# Altium PCB flyback(1).PcbDoc
Units mm, origin at the board's own origin, x right, y up, seen from the top; angles counter-clockwise.
Board outline 151.66 x 75.82 mm, 2 copper layers (F.Cu, B.Cu); 52 components, 27 nets, 126 pads, 4 vias.
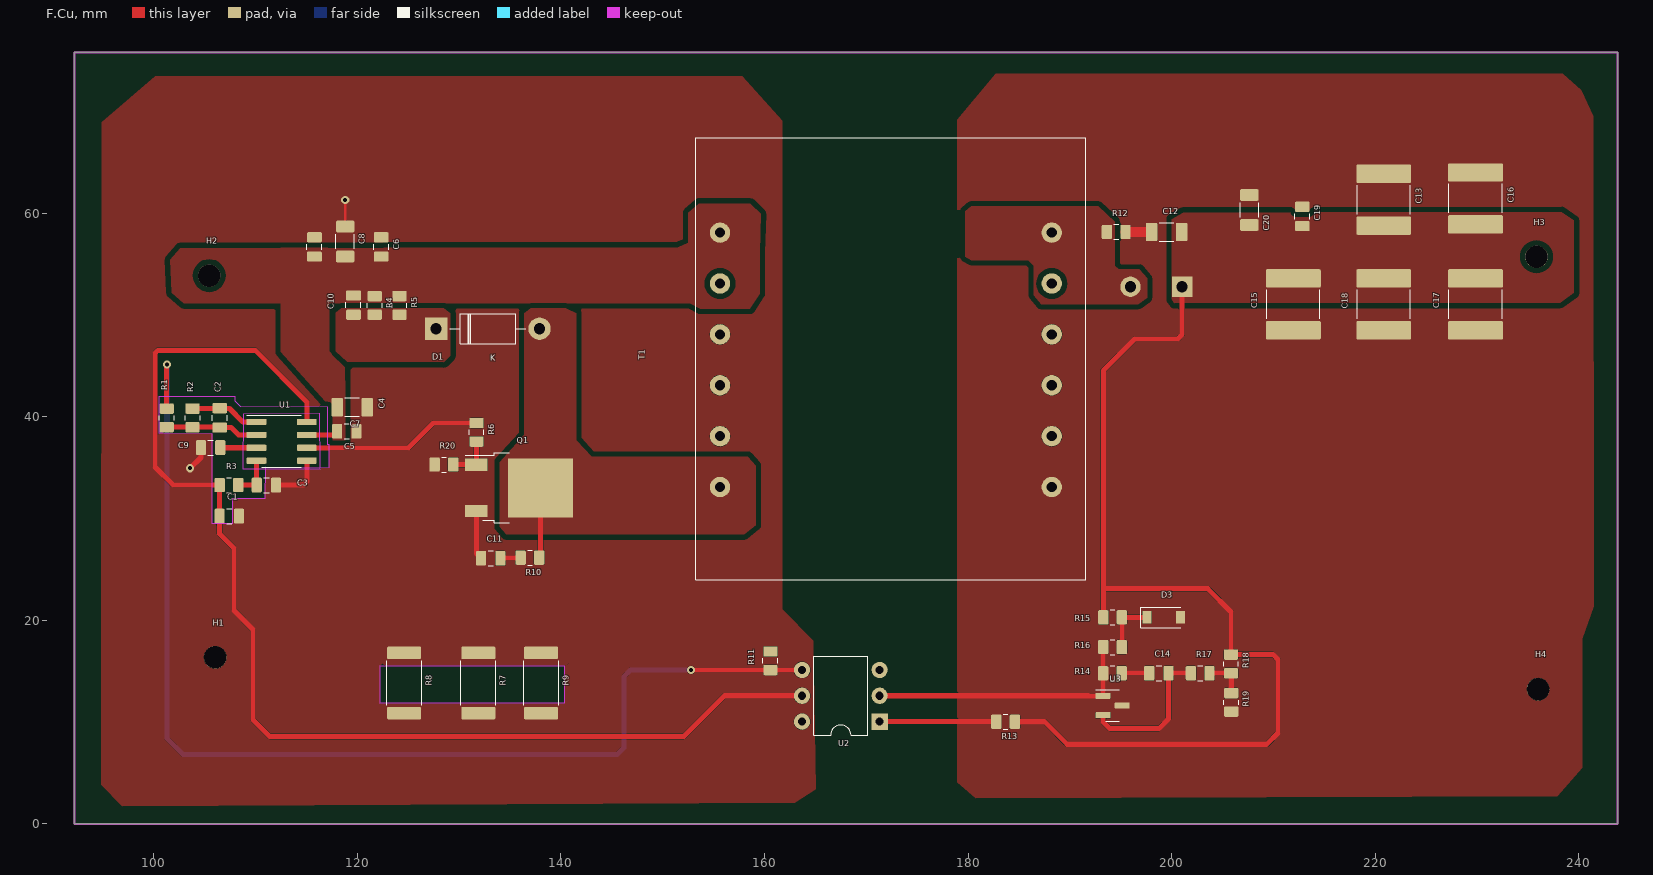
[diagram p0: F.Cu view]
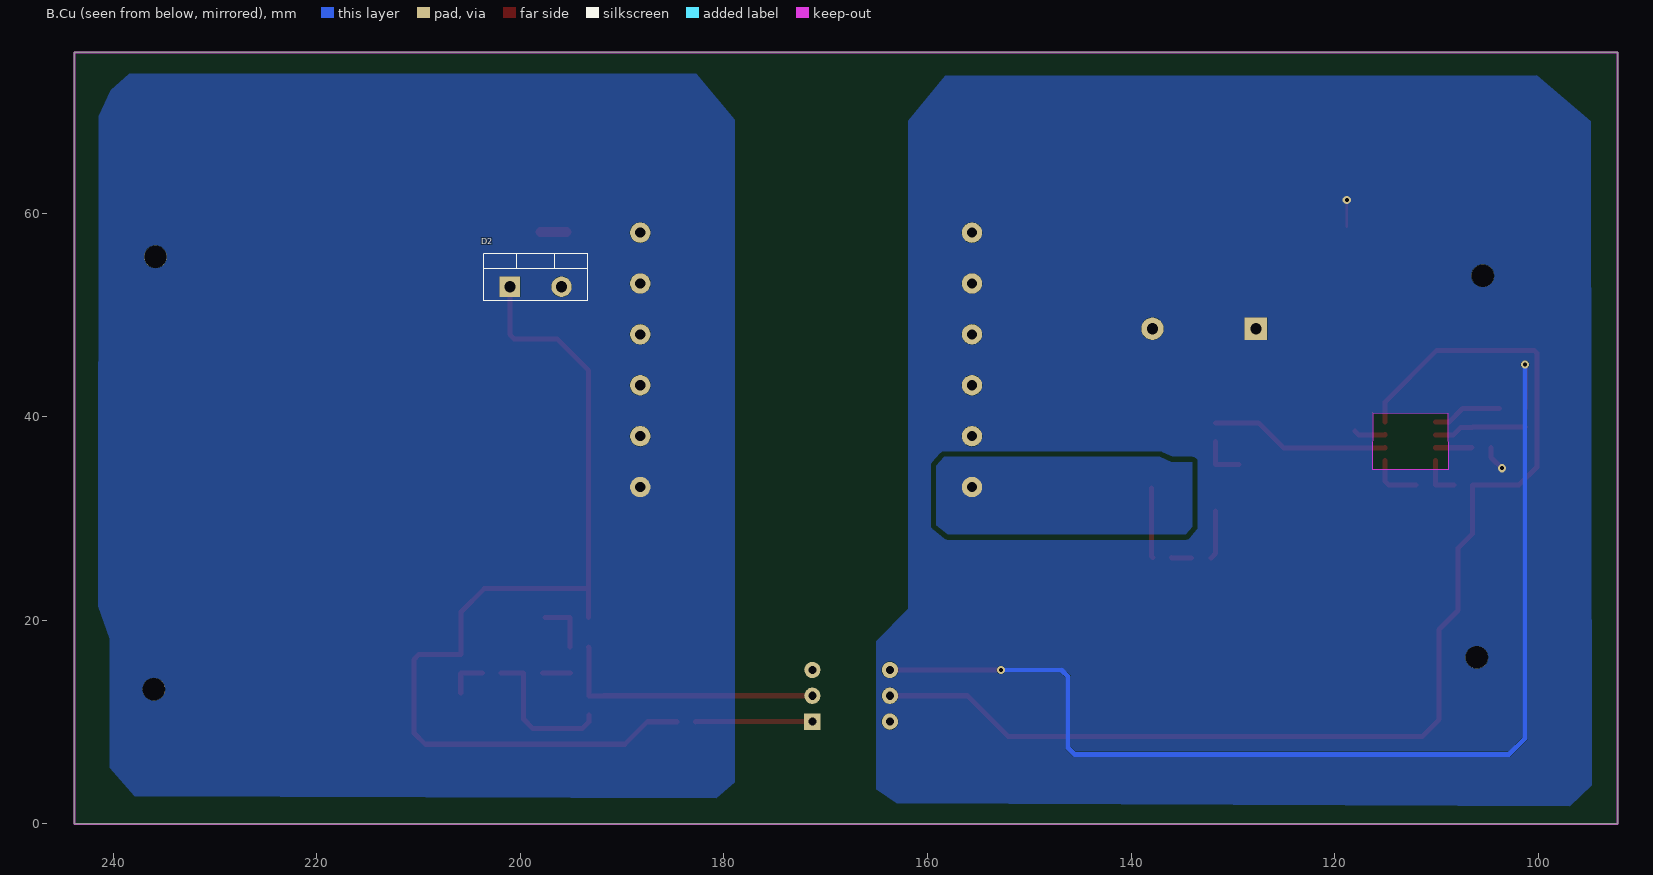
[diagram p1: B.Cu view, seen from below]

## Layer stack, top to bottom
F.Mask: solder mask 0.0102, Solder Resist, Dk 3.5
F.Cu: signal copper 0.0356
Dielectric 1: dielectric 0.32, FR-4, Dk 4.8
B.Cu: signal copper 0.0356
B.Mask: solder mask 0.0102, Solder Resist, Dk 3.5

## Board outline
243.84,0 243.84,75.819 92.177,75.819 92.177,0 243.84,0

## Design rules (kind name [scope] priority, off if disabled: settings)
Clearance "Clearence 0,508_Polygon" [InNamedPolygon('F.Cu-/Vin') OR InNamedPolygon('F.Cu-Net-(D2-Pad2)') OR InNamedPolygon('F.Cu-Net-(C10-Pad2)') OR InNamedPolygon('F.Cu-Net-(D1-Pad2)') OR InNamedPolygon('F.Cu-/Vin-1') OR InNamedPolygon('F.Cu-/Vout') OR InNamedPolygon('B.Cu-Net-(D1-Pad2)')] p1: gap=0.508 ignorepadtopadclearanceinfootprint=FALSE
MinimumSolderMaskSliver [All] p1: minsoldermaskwidth=0
PolygonConnect Polygon_B.Cu-GND1_ConnectDirect [IsNamedPolygon('B.Cu-GND1') vs IsVia] p1: connectstyle=Direct reliefconductorwidth=0.254 reliefentries=4 polygonreliefangle="90 Angle" airgapwidth=0.254
PolygonConnect Polygon_B.Cu-GND1_ConnectRelief45 [IsNamedPolygon('B.Cu-GND1') vs (IsThruPin or IsSMTPin) and (PadShape_AllLayers = 'Round')] p2: connectstyle=Relief reliefconductorwidth=0.508 reliefentries=4 polygonreliefangle="45 Angle" airgapwidth=0.508
PolygonConnect Polygon_B.Cu-GND1_ConnectRelief90 [IsNamedPolygon('B.Cu-GND1') vs (IsThruPin or IsSMTPin) and (PadShape_AllLayers <> 'Round')] p3: connectstyle=Relief reliefconductorwidth=0.508 reliefentries=4 polygonreliefangle="90 Angle" airgapwidth=0.508
PolygonConnect Polygon_B.Cu-Net-(D1-Pad2)_ConnectDirect [IsNamedPolygon('B.Cu-Net-(D1-Pad2)')] p4: connectstyle=Direct reliefconductorwidth=0.254 reliefentries=4 polygonreliefangle="90 Angle" airgapwidth=0.254
PolygonConnect Polygon_F.Cu-/Vout_ConnectDirect [IsNamedPolygon('F.Cu-/Vout')] p5: connectstyle=Direct reliefconductorwidth=0.254 reliefentries=4 polygonreliefangle="90 Angle" airgapwidth=0.254
PolygonConnect Polygon_F.Cu-/Vin-1_ConnectDirect [IsNamedPolygon('F.Cu-/Vin-1')] p6: connectstyle=Direct reliefconductorwidth=0.254 reliefentries=4 polygonreliefangle="90 Angle" airgapwidth=0.254
PolygonConnect Polygon_F.Cu-Net-(D1-Pad2)_ConnectDirect [IsNamedPolygon('F.Cu-Net-(D1-Pad2)')] p7: connectstyle=Direct reliefconductorwidth=0.254 reliefentries=4 polygonreliefangle="90 Angle" airgapwidth=0.254
PolygonConnect Polygon_F.Cu-Net-(C10-Pad2)_ConnectDirect [IsNamedPolygon('F.Cu-Net-(C10-Pad2)')] p8: connectstyle=Direct reliefconductorwidth=0.254 reliefentries=4 polygonreliefangle="90 Angle" airgapwidth=0.254
PolygonConnect Polygon_F.Cu-Net-(D2-Pad2)_ConnectDirect [IsNamedPolygon('F.Cu-Net-(D2-Pad2)')] p9: connectstyle=Direct reliefconductorwidth=0.254 reliefentries=4 polygonreliefangle="90 Angle" airgapwidth=0.254
PolygonConnect Polygon_F.Cu-/Vin_ConnectDirect [IsNamedPolygon('F.Cu-/Vin')] p10: connectstyle=Direct reliefconductorwidth=0.254 reliefentries=4 polygonreliefangle="90 Angle" airgapwidth=0.254
PolygonConnect Polygon_F.Cu-Net-(C11-Pad1)_ConnectDirect [IsNamedPolygon('F.Cu-Net-(C11-Pad1)')] p11: connectstyle=Direct reliefconductorwidth=0.254 reliefentries=4 polygonreliefangle="90 Angle" airgapwidth=0.254
PolygonConnect Polygon_B.Cu-GND2_ConnectDirect [IsNamedPolygon('B.Cu-GND2')] p12: connectstyle=Direct reliefconductorwidth=0.254 reliefentries=4 polygonreliefangle="90 Angle" airgapwidth=0.254
PolygonConnect Polygon_F.Cu-GND2_ConnectDirect [IsNamedPolygon('F.Cu-GND2')] p13: connectstyle=Direct reliefconductorwidth=0.254 reliefentries=4 polygonreliefangle="90 Angle" airgapwidth=0.254
PolygonConnect Polygon_F.Cu-GND1_ConnectDirect [IsNamedPolygon('F.Cu-GND1')] p14: connectstyle=Direct reliefconductorwidth=0.254 reliefentries=4 polygonreliefangle="90 Angle" airgapwidth=0.254
RoutingVias [All] p1: holewidth=0.711 width=1.27 viastyle="Through Hole" minholewidth=0.711 minwidth=1.27 maxholewidth=0.711 maxwidth=1.27
SilkToSilkClearance [All] p1: silktosilkclearance=0
SilkToSolderMaskClearance [IsPad] p1: minsilkscreentomaskgap=0 clearancetoexposedcopper=TRUE
SolderMaskExpansion [All] p1: expansion=0.102 istentingtop=FALSE
Width [All] p1: maxlimit=10 minlimit=0.254 preferedwidth=0.254 minimp=50.000000 maximp=50.000000 favimp=50.000000
27 further rules are at their usual default settings.

## Components (designator, comment, footprint, x,y, rotation, side; value= is the part's Value field where it differs from the comment)
C1 "1u" C_0805_2012Metric 107.409,30.245 r0 top
C2 "100p" C_0805_2012Metric 106.459,39.897 r90 top
C3 "2.2n" C_0805_2012Metric 111.047,33.293 r0 top
C4 "1u" C_0805_2012Metric 115.773,56.693 r270 top
C5 "100n" C_0805_2012Metric 118.948,38.583 r180 top
C6 "100n" C_0805_2012Metric 122.326,56.693 r270 top
C7 "10n" C_1206_3216Metric 119.482,40.945 r180 top
C8 "10n" C_1206_3216Metric 118.796,57.226 r270 top
C9 "0.47n" C_0805_2012Metric 105.57,36.976 r0 top
C10 "220n" C_0805_2012Metric 119.609,50.978 r270 top
C11 "4.7n" C_0805_2012Metric 133.096,26.111 r0 top
C12 "470p" C_1206_3216Metric 199.517,58.166 r0 top
C13 "10u" C_2220_5650Metric 220.853,61.341 r270 top
C14 "1n" C_0805_2012Metric 198.755,14.808 r0 top
C15 "10u" C_2220_5650Metric 211.963,51.054 r90 top
C16 "10u" C_2220_5650Metric 229.87,61.468 r270 top
C17 "10u" C_2220_5650Metric 229.87,51.054 r90 top
C18 "4.7u" C_2220_5650Metric 220.853,51.054 r90 top
C19 "100n" C_0805_2012Metric 212.852,59.69 r270 top
C20 "10n" C_1206_3216Metric 207.645,60.325 r270 top
D1 "1N4002" D_DO-41_SOD81_P10.16mm_Horizontal 127.733,48.66 r0 top
D2 "MBR10150" TO-220-2_Vertical 201.041,52.776 r0 bottom
D3 "MMSZ4713" D_SOD-123 199.238,20.295 r0 top
H1 "MountingHole_Pad" MountingHole_2.2mm_M2 106.02,16.358 r0 top
H2 "MountingHole_Pad" MountingHole_2.2mm_M2 105.435,53.873 r0 top
H3 "MountingHole_Pad" MountingHole_2.2mm_M2 235.864,55.728 r0 top
H4 "MountingHole_Pad" MountingHole_2.2mm_M2 236.017,13.233 r0 top
Q1 "IRFR3410TRLPBF" TO-252-2 135.89,33.02 r0 top
R1 "4.7k" R_0805_2012Metric 101.252,39.897 r270 top
R2 "22k" R_0805_2012Metric 103.792,39.897 r90 top
R3 "12k" R_0805_2012Metric 107.364,33.293 r0 top
R4 "1k" R_0805_2012Metric 121.691,50.952 r270 top
R5 "1k" R_0805_2012Metric 124.13,50.952 r270 top
R6 "10" R_0805_2012Metric 131.699,38.482 r270 top
R7 "150m" R_2512_6332Metric 131.877,13.843 r270 top
R8 "150m" R_2512_6332Metric 124.587,13.843 r270 top
R9 "150m" R_2512_6332Metric 138.049,13.843 r270 top
R10 "47" R_0805_2012Metric 136.947,26.162 r180 top
R11 "10k" R_0805_2012Metric 160.579,16.027 r90 top
R12 "100" R_0805_2012Metric 194.564,58.166 r0 top
R13 "22k" R_0805_2012Metric 183.691,10.033 r180 top
R14 "820k" R_0805_2012Metric 194.183,14.808 r0 top
R15 "22k" R_0805_2012Metric 194.208,20.295 r0 top
R16 "1k" R_0805_2012Metric 194.208,17.374 r180 top
R17 "10k" R_0805_2012Metric 202.819,14.808 r0 top
R18 "182k" R_0805_2012Metric 205.842,15.723 r270 top
R19 "10k" R_0805_2012Metric 205.867,11.938 r270 top
R20 "10k" R_0805_2012Metric 128.489,35.307 r0 top
T1 "Transformer_1P_1S" Transformer_37x44 155.63,38.1 r90 top
U1 "UC3843_SOIC8" SOIC-8_3.9x4.9mm_P1.27mm 112.547,37.592 r0 top
U2 "4N25" DIP-6_W7.62mm 171.313,10.048 r180 top
U3 "TL431DBZ" SOT-23 194.207,11.633 r0 top

## Footprints (in the part's own frame and the unit in brackets; to place one, negate y for a bottom-side part, rotate by r counter-clockwise, add the part's x,y. Pads: shape width x height; smd on the part's side, far side on the other; paste and mask are expansions set on the pad)
C_0805_2012Metric [mm]
  rrect25% 1x1.45 smd mask+0: 1(-0.95,0) 2(0.95,0)
  silkscreen extent -0.26,-0.73 0.26,0.73
C_1206_3216Metric [mm]
  rrect22% 1.15x1.8 smd mask+0: 1(-1.475,0) 2(1.475,0)
  silkscreen extent -0.71,-0.91 0.71,0.91
C_2220_5650Metric [mm]
  rrect14% 1.8x5.4 smd mask+0: 1(-2.55,0) 2(2.55,0)
  silkscreen extent -1.42,-2.61 1.42,2.61
D_DO-41_SOD81_P10.16mm_Horizontal [mm]
  rect 2.2x2.2 hole 1.1 paste-2.2 mask+0: 1(0,0)
  rrect100% 2.2x2.2 hole 1.1 paste-2.2 mask+0: 2(10.16,0)
  silkscreen extent 1.34,-1.47 8.82,1.47
D_SOD-123 [mm]
  rect 0.9x1.2 smd mask+0: 1(-1.65,0) 2(1.65,0)
  silkscreen extent -2.25,-1 1.65,1
DIP-6_W7.62mm [mm]
  rect 1.6x1.6 hole 0.8 paste-1.6 mask+0: 1(0,0)
  rrect100% 1.6x1.6 hole 0.8 paste-1.6 mask+0: 2(0,-2.54) 3(0,-5.08) 4(7.62,-5.08) 5(7.62,-2.54) 6(7.62,0)
  silkscreen extent 1.16,-6.41 6.46,1.33
MountingHole_2.2mm_M2 [mm]
  round 2.2 hole 2.2 paste-2.2 mask+0: Un1(0,0)
R_0805_2012Metric [mm]
  rrect24% 1.025x1.4 smd mask+0: 1(-0.913,0) 2(0.913,0)
  silkscreen extent -0.23,-0.73 0.23,0.73
R_2512_6332Metric [mm]
  rrect20% 1.225x3.35 smd mask+0: 1(-2.963,0) 2(2.963,0)
  silkscreen extent -2.18,-1.71 2.18,1.71
SOIC-8_3.9x4.9mm_P1.27mm [mm]
  rrect25% 1.95x0.6 smd mask+0: 1(-2.475,1.905) 2(-2.475,0.635) 3(-2.475,-0.635) 4(-2.475,-1.905) 5(2.475,-1.905) 6(2.475,-0.635) 7(2.475,0.635) 8(2.475,1.905)
  silkscreen extent -3.45,-2.56 1.95,2.56
SOT-23 [mm]
  rrect25% 1.475x0.6 smd mask+0: 1(-0.937,0.95) 2(-0.937,-0.95) 3(0.937,0)
  silkscreen extent -1.68,-1.56 0.65,1.56
TO-220-2_Vertical [mm]
  rect 2x2 hole 1.1 paste-2 mask+0: 1(0,0)
  rrect100% 2x2 hole 1.1 paste-2 mask+0: 2(-5.08,0)
  silkscreen extent -7.66,-3.27 2.58,1.37
TO-252-2 [mm]
  rect 2.2x1.2 smd mask+0: 1(-4.2,2.28) 3(-4.2,-2.28)
  rect 6.4x5.8 smd paste-6.4 mask+0: 2(2.1,0)
  rect 3.05x2.75 on Top Paste mask-3.05: Un1(3.775,1.525) Un2(0.425,1.525) Un3(3.775,-1.525) Un4(0.425,-1.525)
  silkscreen extent -5.3,-3.45 -0.97,3.45
Transformer_37x44 [mm]
  round 2 hole 1 paste-2 mask+0: 1(-5,0) 2(0,0) 3(5,0) 4(10,0) 5(15,0) 6(20,0) 7(20,-32.6) 8(15,-32.6) 9(10,-32.6) 10(5,-32.6) 11(0,-32.6) 12(-5,-32.6)
  silkscreen extent -14.09,-35.93 29.33,2.41

## Part data
C1 C2 C3 C4 C5 C6 C9 C10 C11 C14 C19: library part C_0805_2012Metric, "Capacitor SMD 0805 (2012 Metric), square (rectangular) end terminal, IPC_7351 nominal, (Body size source: IPC-SM-782 page 76, https://www.pcb-3d.com/wordpress/wp-content/uploads/ipc-sm-782a_amendment_1_and_2.pdf, https://docs.google.com/spreadsheets/d/1BsfQQcO9C6DZCsRaXUlFlo91Tg2WpOkGARC1WS5S8t0/edit?usp=sharing), generated with kicad-footprint-generator", Sheetfile=flyback.kicad_sch
C7 C8 C12 C20: library part C_1206_3216Metric, "Capacitor SMD 1206 (3216 Metric), square (rectangular) end terminal, IPC_7351 nominal, (Body size source: IPC-SM-782 page 76, https://www.pcb-3d.com/wordpress/wp-content/uploads/ipc-sm-782a_amendment_1_and_2.pdf), generated with kicad-footprint-generator", Sheetfile=flyback.kicad_sch
C13 C15 C16 C17 C18: library part C_2220_5650Metric, "Capacitor SMD 2220 (5650 Metric), square (rectangular) end terminal, IPC_7351 nominal, (Body size from: http://datasheets.avx.com/AVX-HV_MLCC.pdf), generated with kicad-footprint-generator", Sheetfile=flyback.kicad_sch
D1: library part D_DO-41_SOD81_P10.16mm_Horizontal, "Diode, DO-41_SOD81 series, Axial, Horizontal, pin pitch=10.16mm, , length*diameter=5.2*2.7mm^2, , http://www.diodes.com/_files/packages/DO-41%20(Plastic).pdf", Sheetfile=flyback.kicad_sch
D2: library part TO-220-2_Vertical, "TO-220-2, Vertical, RM 5.08mm, see https://www.centralsemi.com/PDFS/CASE/TO-220-2PD.PDF", Sheetfile=flyback.kicad_sch
D3: library part D_SOD-123, "SOD-123", Sheetfile=flyback.kicad_sch
H1 H2 H3 H4: library part MountingHole_2.2mm_M2, "Mounting Hole 2.2mm, no annular, M2", Sheetfile=flyback.kicad_sch
Q1: library part TO-252-2, "TO-252 / DPAK SMD package, http://www.infineon.com/cms/en/product/packages/PG-TO252/PG-TO252-3-1/", Sheetfile=flyback.kicad_sch
R1 R2 R3 R4 R5 R6 R10 R11 R12 R13 R14 R15 R16 R17 R18 R19 R20: library part R_0805_2012Metric, "Resistor SMD 0805 (2012 Metric), square (rectangular) end terminal, IPC_7351 nominal, (Body size source: IPC-SM-782 page 72, https://www.pcb-3d.com/wordpress/wp-content/uploads/ipc-sm-782a_amendment_1_and_2.pdf), generated with kicad-footprint-generator", Sheetfile=flyback.kicad_sch
R7 R8 R9: library part R_2512_6332Metric, "Resistor SMD 2512 (6332 Metric), square (rectangular) end terminal, IPC_7351 nominal, (Body size source: IPC-SM-782 page 72, https://www.pcb-3d.com/wordpress/wp-content/uploads/ipc-sm-782a_amendment_1_and_2.pdf), generated with kicad-footprint-generator", Sheetfile=flyback.kicad_sch
T1: library part Transformer_37x44, "transformer 37x44mm²", Sheetfile=flyback.kicad_sch
U1: library part SOIC-8_3.9x4.9mm_P1.27mm, "SOIC, 8 Pin (JEDEC MS-012AA, https://www.analog.com/media/en/package-pcb-resources/package/pkg_pdf/soic_narrow-r/r_8.pdf), generated with kicad-footprint-generator ipc_gullwing_generator.py", Sheetfile=flyback.kicad_sch
U2: library part DIP-6_W7.62mm, "6-lead though-hole mounted DIP package, row spacing 7.62 mm (300 mils)", Sheetfile=flyback.kicad_sch
U3: library part SOT-23, "SOT, 3 Pin (https://www.jedec.org/system/files/docs/to-236h.pdf variant AB), generated with kicad-footprint-generator ipc_gullwing_generator.py", Sheetfile=flyback.kicad_sch

## Via types
v1: diameter 0.8, hole 0.4, F.Cu to B.Cu, tented both sides, 4 vias

## Nets (pads, with @x,y where several pads share a name; then routed paths per layer and width w, separated by ;. In a path a pad name is that pad's centre, name@x,y a point inside that pad or via, vN(x,y) a via of type N, cw(c..) or ccw(c..) an arc to the next point about the centre after c; other vN are vias at no path point)
GND1: C1.2 C3.2 C4.1 C5.1 C6.1 C7.1 C8.1 C9.1 R7.2 R8.2 R9.2 R20.1 U1.5 | length 10.3
  F.Cu w0.25: C8.1 v1(118.796,61.29)
  F.Cu w0.5: v1(103.556,34.95) 104.62,36.015 C9.1 ; C3.2 114.675,33.293 115.022,33.641 U1.5
GND2: C13.1 C15.1 C16.1 C17.1 C18.1 C19.1 C20.1 D3.2 R19.2 T1.12 U3.3
GNDA: R11.2
Net-(C2-Pad1): C2.1 R1.2 R2.1 U1.2 | length 9.1
  F.Cu w0.5: R1.2 106.421,38.984 C2.1 107.586,38.947 108.306,38.227 U1.2
Net-(C2-Pad2): C2.2 R2.2 U1.1 | length 6.8
  F.Cu w0.5: R2.2 107.425,40.809 108.737,39.497 U1.1
Net-(C3-Pad1): C3.1 R3.2 U1.4 | length 4.2
  F.Cu w0.5: R3.2 C3.1 110.072,33.318 U1.4
Net-(C9-Pad2): C9.2 U1.3 | length 3.6
  F.Cu w0.5: C9.2 106.539,36.957 U1.3
Net-(C10-Pad2): C10.2 D1.1 R4.2 R5.2
Net-(C11-Pad1): C11.1 Q1.3 R7.1 R8.1 R9.1 | length 4.8
  F.Cu w0.5: Q1.3 131.69,26.567 C11.1
Net-(C11-Pad2): C11.2 R10.2 | length 2
  F.Cu w0.5: C11.2 135.983,26.111 R10.2
Net-(C12-Pad1): C12.1 R12.2 | length 2.6
  F.Cu w1: R12.2 C12.1
Net-(C14-Pad1): C14.1 R14.2 | length 2.7
  F.Cu w0.5: R14.2 C14.1
Net-(C14-Pad2): C14.2 R17.1 U3.2 | length 14.5
  F.Cu w0.5: U3.2 193.269,10.033 193.929,9.373 198.78,9.373 199.705,10.297 C14.2 R17.1
Net-(D1-Pad2): D1.2 Q1.2 R10.1 T1.1 | length 6.9
  F.Cu w0.5: R10.1 137.99,26.293 Q1.2
Net-(D2-Pad2): D2.2 R12.1 T1.7
Net-(D3-Pad1): D3.1 R15.2 R16.1 | length 5.4
  F.Cu w0.5: R16.1 R15.2 D3.1
Net-(Q1-Pad1): Q1.1 R6.2 R20.2 | length 4.6
  F.Cu w0.5: R20.2 129.408,35.3 Q1.1 131.699,35.309 R6.2
Net-(R6-Pad1): R6.1 U1.6 | length 17.7
  F.Cu w0.5: U1.6 115.048,36.932 124.993,36.932 127.456,39.395 R6.1
Net-(R13-Pad2): R13.2 U2.1 | length 11.5
  F.Cu w0.5: U2.1 182.763,10.048 R13.2
Net-(R14-Pad1): R14.1 R16.2 U2.2 U3.1 | length 26.8
  F.Cu w0.5: U2.2 191.857,12.588 ; 191.811,12.583 U3.1 193.269,14.807 R14.1 193.27,17.348 R16.2
Net-(R17-Pad2): R17.2 R18.2 R19.1 | length 4.1
  F.Cu w0.5: R17.2 205.84,14.808 R18.2 205.867,14.785 R19.1
unconnected-(U2-Pad3): U2.3
unconnected-(U2-Pad6): U2.6
Vfb: R1.1 R11.1 U2.4 | length 111.8
  F.Cu w0.5: R1.1@101.244,40.818 R1.1 101.252,45.118 v1(101.27,45.136) ; v1(152.781,15.113) 152.779,15.115 152.732,15.115 R11.1 160.592,15.128 U2.4
  B.Cu w0.5: v1(101.27,45.136) 101.27,8.407 102.845,6.833 145.542,6.833 146.177,7.468 146.177,14.453 146.837,15.113 v1(152.781,15.113)
Vin: C4.2 C5.2 C6.2 C7.2 C8.2 C10.1 R4.1 R5.1 T1.6 U1.7 | length 3.2
  F.Cu w0.5: U1.7@115.048,38.252 U1.7 117.643,38.227 C5.2 C5.2@118.007,38.591
Vout: C12.2 C13.2 C15.2 C16.2 C17.2 C18.2 C19.2 C20.2 D2.1 R13.1 R15.1 R18.1 | length 95.5
  F.Cu w0.5: R13.1 187.528,10.033 189.738,7.823 209.347,7.823 210.464,8.941 210.464,16.154 209.984,16.635 R18.1 205.842,20.828 203.554,23.116 193.296,23.116 193.296,22.709 ; R15.1 193.296,22.709 ; D2.1 201.041,48.082 200.609,47.65 196.393,47.65 193.296,44.553 193.296,22.709
Vref: C1.1 R3.1 U1.8 U2.5 | length 118.1
  F.Cu w0.25: C1.1@106.452,30.252 C1.1
  F.Cu w0.5: C1.1@106.452,30.252 R3.1 101.886,33.293 100.102,35.077 100.102,46.254 100.381,46.533 109.957,46.533 115.022,41.467 U1.8 ; C1.1 106.451,30.237 106.451,28.499 107.86,27.091 107.86,20.969 109.728,19.101 109.728,10.236 111.379,8.585 152.07,8.585 156.073,12.588 U2.5
pads on no net: H1.Un1 H2.Un1 H3.Un1 H4.Un1 Q1.Un1 Q1.Un2 Q1.Un3 Q1.Un4 T1.2 T1.3 T1.4 T1.5 T1.8 T1.9 T1.10 T1.11

## Polygon pours and split planes (outlines as drawn)
Vout on F.Cu "F.Cu-/Vout" (solid, remove dead copper, pour order 13): 239.522,59.309 239.547,52.172 238.201,51.206 200.279,51.181 200.025,51.562 200.025,59.436 201.168,60.071 238.354,60.122
Vin on F.Cu "F.Cu-/Vin-1" (solid, remove dead copper, pour order 12): 117.221,46.457 118.77,44.856 118.796,42.291 118.796,37.617 118.618,37.465 117.246,37.465 117.119,37.592 117.119,41.224 112.471,46.406 112.471,56.591 117.246,56.591
Net-(D1-Pad2) on F.Cu "F.Cu-Net-(D1-Pad2)" (solid, remove dead copper, pour order 11): 141.478,50.165 141.478,37.719 143.002,36.068 158.369,36.068 159.131,35.179 159.131,29.337 157.988,28.448 134.62,28.448 133.985,29.21 133.985,35.56 136.398,38.227 136.398,50.165 137.033,50.673 140.462,50.673
Net-(C10-Pad2) on F.Cu "F.Cu-Net-(C10-Pad2)" (solid, remove dead copper, pour order 10): 129.13,50.184 129.13,45.993 128.495,45.358 118.974,45.39 117.881,46.431 117.881,50.216 118.415,50.673 128.495,50.692
Net-(D2-Pad2) on F.Cu "F.Cu-Net-(D2-Pad2)" (solid, remove dead copper, pour order 9): 194.437,59.182 194.437,54.864 194.818,54.483 196.85,54.483 197.612,53.594 197.612,51.689 196.723,51.054 187.198,51.054 186.436,51.943 186.436,54.864 185.928,55.372 180.34,55.372 179.705,55.753 179.705,60.198 180.34,60.706 192.786,60.706
Vin on F.Cu "F.Cu-/Vin" (solid, remove dead copper, pour order 8): 159.639,59.944 159.512,56.134 159.512,54.991 159.512,52.07 158.547,50.622 153.67,50.622 152.652,51.181 102.946,51.156 101.727,52.197 101.6,55.448 102.587,56.581 151.507,56.682 152.527,57.099 152.527,60.071 153.543,60.96 158.623,60.96
Net-(C11-Pad1) on F.Cu "F.Cu-Net-(C11-Pad1)" (solid, remove dead copper, pour order 7): 133.026,31.624 133.076,19.788 133.604,18.593 140.233,18.618 141.097,17.831 141.046,16.002 140.437,15.57 122.682,15.57 121.996,16.129 121.996,17.932 122.657,18.72 129.565,18.72 130.251,19.685 130.251,31.623 130.48,31.902 132.563,31.902
GND2 on F.Cu "F.Cu-GND2" (solid, remove dead copper, pour order 6): 240.259,72.111 241.425,69.521 241.476,21.363 240.348,18.185 240.335,5.537 237.922,2.692 180.772,2.515 178.936,4.086 178.962,69.212 182.728,73.736 238.455,73.736
GND1 on F.Cu "F.Cu-GND1" (solid, remove dead copper, pour order 3): 161.722,69.113 161.747,59.792 161.747,21.107 164.77,17.983 165.024,3.378 162.992,2.057 96.901,1.753 94.824,3.837 94.849,68.963 100.152,73.482 157.836,73.482
GND1 on B.Cu "B.Cu-GND1" (solid, remove dead copper, pour order 5): 161.9,69.113 161.874,21.158 165.049,17.958 165.049,3.378 163.017,2.032 96.876,1.727 94.741,3.816 94.842,69.043 100.127,73.558 158.242,73.508
Net-(D1-Pad2) on B.Cu "B.Cu-Net-(D1-Pad2)" (solid, remove dead copper, pour order 4): 141.351,36.068 141.732,36.068 143.002,36.068 158.369,36.068 159.131,35.179 159.131,29.337 157.988,28.448 134.62,28.448 133.985,29.21 133.985,35.56 136.017,35.56 137.16,36.068 138.176,36.068 140.716,36.068
GND2 on B.Cu "B.Cu-GND2" (solid, remove dead copper, pour order 14): 240.259,72.111 241.425,69.521 241.476,21.363 240.348,18.185 240.335,5.537 237.922,2.692 180.772,2.515 178.936,4.086 178.962,69.212 182.728,73.736 238.455,73.736

## Keep-outs
F.Cu:
  region: 116.281,34.849 108.788,34.849 108.839,40.31 116.256,40.335
  region: 107.95,41.58 108.458,41.021 117.043,40.996 117.043,39.345 117.043,37.313 117.17,37.313 117.17,35.001 110.922,35.028 110.896,31.953 107.694,31.947 107.696,29.515 105.715,29.489 105.715,38.354 100.863,38.379 100.508,38.379 100.508,42.012 107.95,42.012
  region: 140.335,11.862 122.225,11.862 122.225,15.519 140.335,15.519
B.Cu:
  region: 116.281,34.849 108.788,34.849 108.839,40.31 116.256,40.335
Edge.Cuts:
  lines w0.2: 92.177,0 243.84,0 ; 92.177,0 92.177,75.819 ; 92.177,0 243.84,0 ; 92.177,0 92.177,75.819 ; 92.177,75.819 243.84,75.819 ; 92.177,75.819 243.84,75.819 ; 243.84,0 243.84,75.819 ; 243.84,0 243.84,75.819

## Text inside footprints (layer, text, board x,y; h text height)
D1: F.Fab "K" at 127.609,50.483 h1; F.SilkS "K" at 133.07,45.335 h1